# Altium PCB PCB1.PcbDoc (part 5 of 5)
Units mm, origin at the board's own origin, x right, y up, seen from the top; angles counter-clockwise.
Board outline 200 x 110 mm, 4 copper layers (Top Layer, Power Layer, GND Layer, Bottom Layer), stack 1.714 mm thick; 627 components, 400 nets, 2020 pads, 570 vias.
Unrouted connection lines stored in the file: 110.
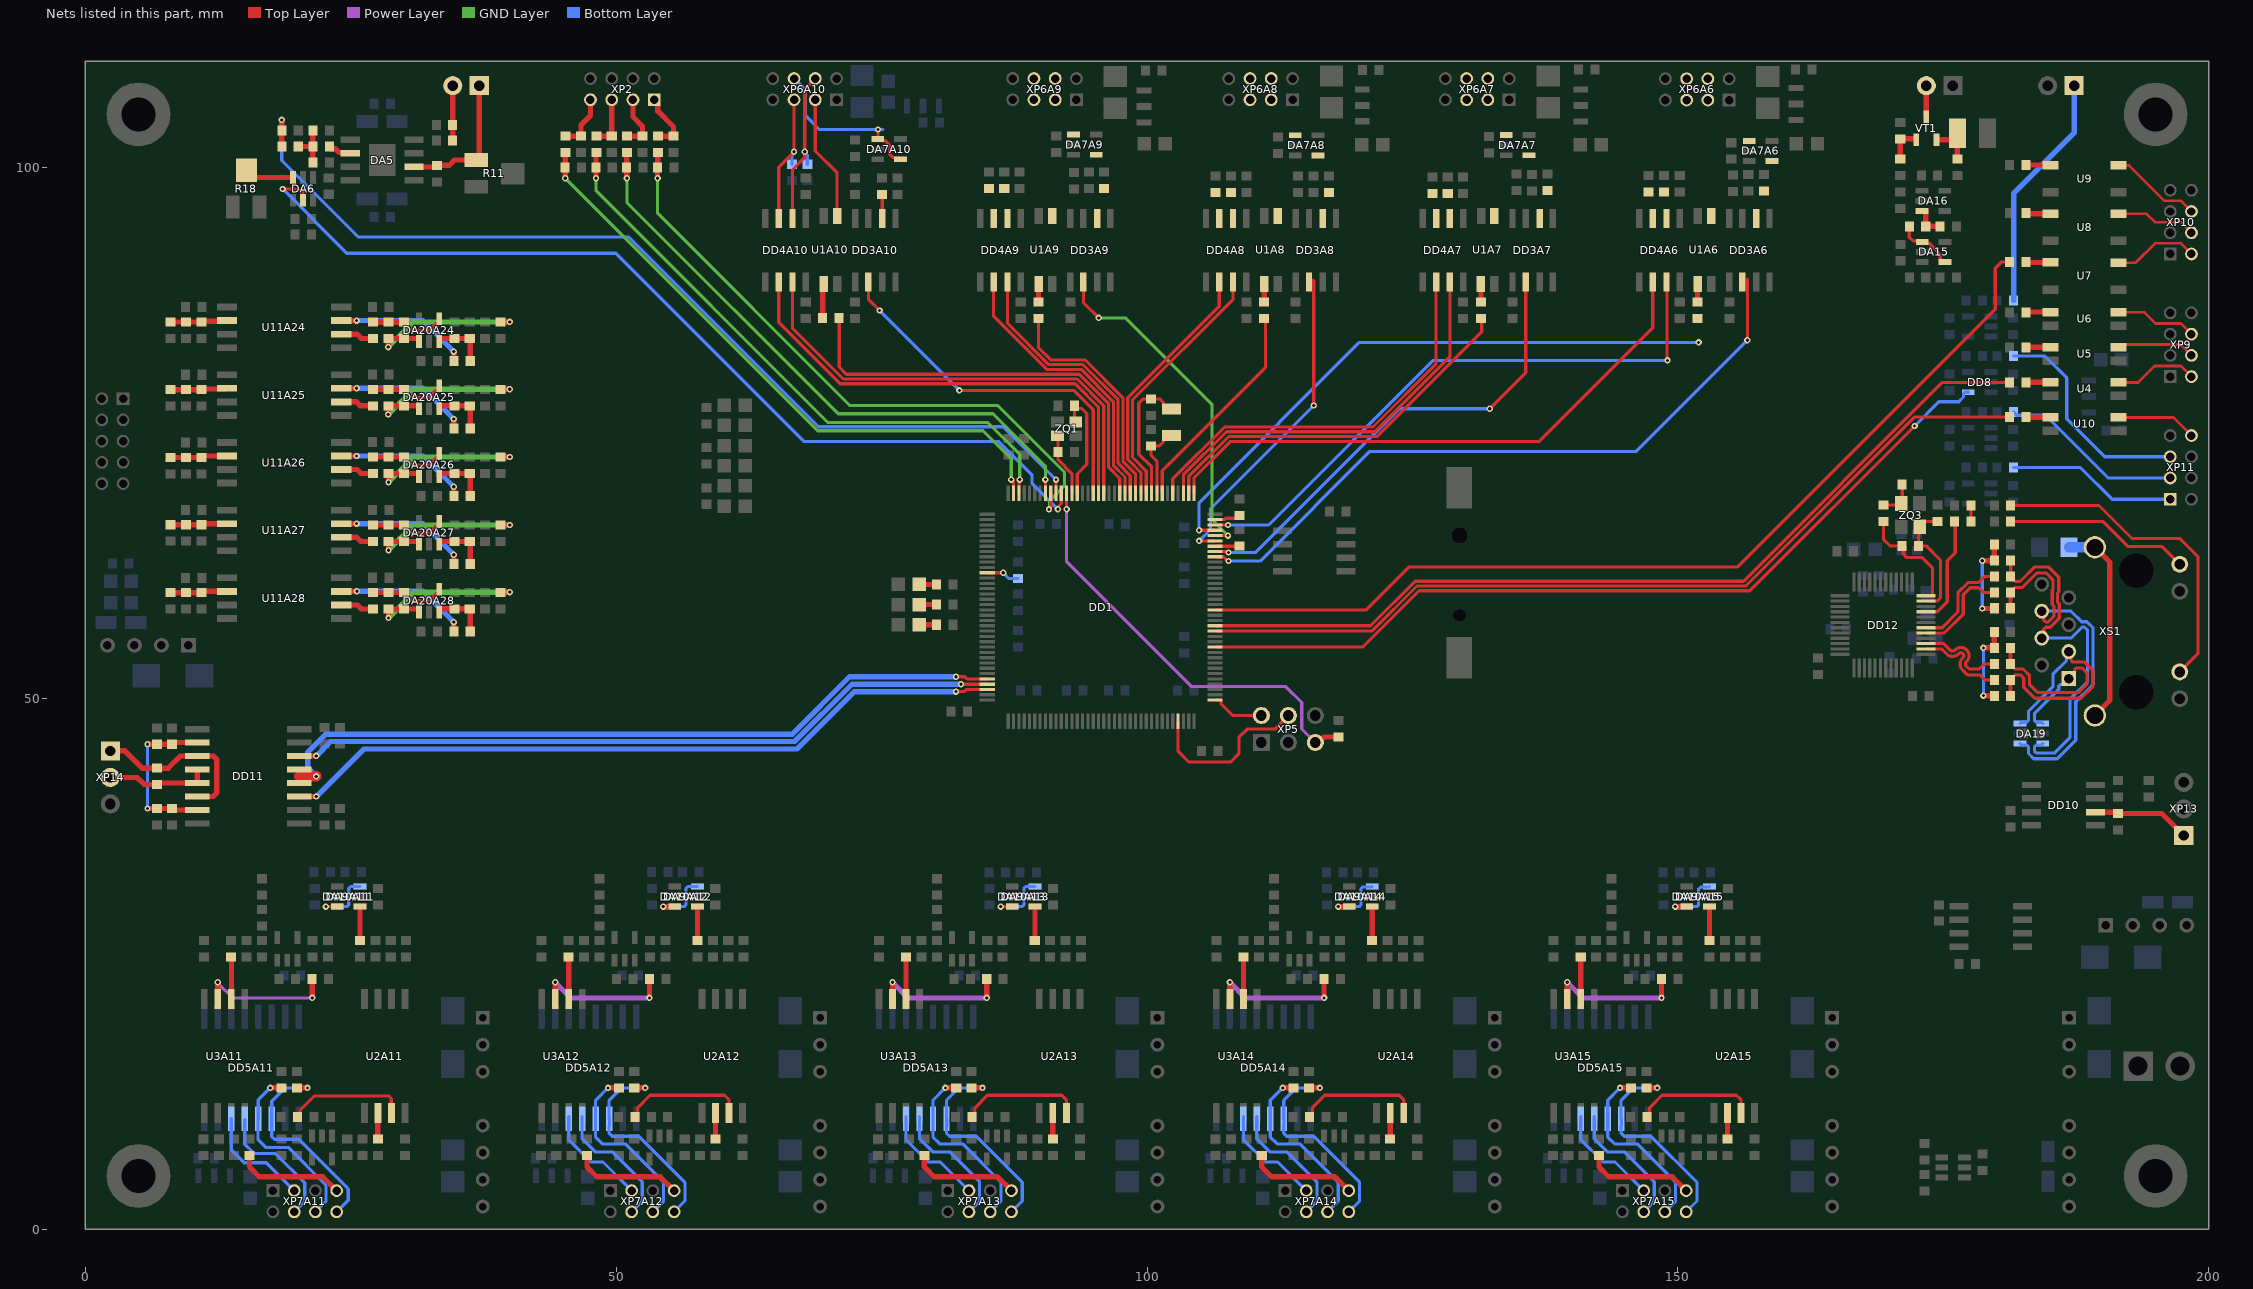
[diagram p6: the nets of this part, all layers, seen from the top]

## Via types
v1: diameter 0.6, hole 0.3, Top Layer to Bottom Layer, tented both sides, 557 vias
v2: diameter 0.6, hole 0.3, Top Layer to Bottom Layer, 12 vias
v3: diameter 0.5, hole 0.2, Top Layer to Bottom Layer, tented both sides, 1 vias

## Nets (pads, with @x,y where several pads share a name; then routed paths per layer and width w, separated by ;. In a path a pad name is that pad's centre, name@x,y a point inside that pad or via, vN(x,y) a via of type N, cw(c..) or ccw(c..) an arc to the next point about the centre after c; other vN are vias at no path point) (continued)
NetC100_2: C100.2 C101.1 C102.1 C103.1 DD11.10 DD11.15 | length 15.6
  Top Layer w0.5: v1(5.85,39.619) C102.1@6.725,39.619 C100.2@8.175,39.619 8.315,39.479 DD11.15@10.55,39.479 ; v1(5.85,45.669) C103.1@6.725,45.669 C101.1@8.175,45.669 8.335,45.829 DD11.10@10.55,45.829
  Bottom Layer w0.3: v1(5.85,39.619) v1(5.85,45.669)
NetC105_1: C105.1 XS1.13 XS1.14 | length 19.4
  Top Layer w0.5: XS1.13@189.275,48.382 190.675,49.782 190.675,62.822 XS1.14@189.275,64.222
  Bottom Layer w0.3: C105.1@186.85,64.225 C105.1@186.852,64.222
  Bottom Layer w1: C105.1@186.852,64.222 XS1.14@189.275,64.222
NetC107_1: C107.1 R65.2 R66.2 | length 8.1
  Top Layer w0.5: v1(178.775,50.25) 179.778,50.25 R65.2@179.8,50.229 ; v1(178.775,54.75) 179.778,54.75 179.8,54.728 C107.1@179.8,56.229
  Bottom Layer w0.3: v1(178.775,50.25) v1(178.775,54.75)
NetC108_1: C108.1 R67.2 R68.2 | length 8.3
  Top Layer w0.5: v1(178.675,58.45) 179.775,58.45 R67.2@179.8,58.475 ; v1(178.675,62.95) 179.775,62.95 179.8,62.975 C108.1@179.8,64.475
  Bottom Layer w0.3: v1(178.675,58.45) v1(178.675,62.95)
NetC112_1: C112.1 R78.2 ZQ3.3 | length 3.6
  Top Layer w0.3: R78.2@169.375,68.2 170.9,68.2 171.05,68.35 171.125,68.425 C112.1@171.125,70.15
NetC122A24_2: C122A24.2 R80A24.1 R81A24.1 U11A24.2 | length 5.4
  Top Layer w0.5: R80A24.1@8.025,85.444 R81A24.1@9.475,85.444 C122A24.2@10.925,85.444 ; C122A24.2@10.925,85.507 13.287,85.507 U11A24.2@13.35,85.569
NetC122A25_2: C122A25.2 R80A25.1 R81A25.1 U11A25.2 | length 5.4
  Top Layer w0.5: R80A25.1@8.025,79.069 C122A25.2@10.925,79.069 ; C122A25.2@10.925,79.132 13.288,79.132 U11A25.2@13.35,79.194
NetC122A26_2: C122A26.2 R80A26.1 R81A26.1 U11A26.2 | length 5.4
  Top Layer w0.5: R80A26.1@8.042,72.687 9.492,72.687 10.942,72.687 11.074,72.819 U11A26.2@13.35,72.819
NetC122A27_2: C122A27.2 R80A27.1 R81A27.1 U11A27.2 | length 5.4
  Top Layer w0.5: R80A27.1@8.025,66.344 R81A27.1@9.475,66.344 C122A27.2@10.925,66.344 11.025,66.444 U11A27.2@13.35,66.444
NetC122A28_2: C122A28.2 R80A28.1 R81A28.1 U11A28.2 | length 5.4
  Top Layer w0.5: R80A28.1@8.025,59.944 C122A28.2@10.925,59.944 11.05,60.069 U11A28.2@13.35,60.069
NetC124A24_1: C124A24.1 DA20A24.3 R82A24.2 R84A24.1 | length 5.2
  Top Layer w0.5: DA20A24.3@33.325,83.594 33.325,83.769 33.45,83.894 34.75,83.894 36.2,83.894 36.25,83.844 R82A24.2@36.25,81.775
NetC124A25_1: C124A25.1 DA20A25.3 R82A25.2 R84A25.1 | length 5
  Top Layer w0.5: DA20A25.3@33.325,77.275 33.325,77.425 33.45,77.55 R84A25.1@34.75,77.55 C124A25.1@36.2,77.55 36.25,77.5 R82A25.2@36.25,75.65
NetC124A26_1: C124A26.1 DA20A26.3 R82A26.2 R84A26.1 | length 5.3
  Top Layer w0.5: DA20A26.3@33.325,70.9 33.325,71.15 33.35,71.175 R84A26.1@34.75,71.175 36.25,71.175 R82A26.2@36.25,69.05
NetC124A27_1: C124A27.1 DA20A27.3 R82A27.2 R84A27.1 | length 5.2
  Top Layer w0.5: DA20A27.3@33.325,64.494 33.325,64.644 33.45,64.769 36.2,64.769 36.25,64.719 R82A27.2@36.25,62.644
NetC124A28_1: C124A28.1 DA20A28.3 R82A28.2 R84A28.1 | length 5.3
  Top Layer w0.5: DA20A28.3@33.325,58.125 33.325,58.4 33.35,58.425 R84A28.1@34.75,58.425 C124A28.1@36.2,58.425 36.25,58.375 R82A28.2@36.25,56.294
NetC126A24_1: C126A24.1 DA20A24.4 R83A24.2 R85A24.2 | length 7.2
  Top Layer w0.3: R85A24.2@30,85.444 30.05,85.444 30.825,84.669 32.355,84.669 32.98,85.294 33.2,85.294 33.325,85.419 DA20A24.4@33.325,85.744
  Top Layer w0.58: R83A24.2@27.1,85.444 28.55,85.444 R85A24.2@30,85.444
NetC126A24_2: C126A24.2 DA20A24.1 R85A24.1 R86A24.1 | length 17.2
  Top Layer w0.5: v1(28.525,83.075) 28.537,83.087 28.537,83.888 C126A24.2@28.55,83.9 ; C126A24.2@28.55,83.894 31.3,83.894 31.425,83.769 DA20A24.1@31.425,83.594 ; R86A24.1@39.1,85.45 v1(39.975,85.45)
  GND Layer w0.5: v1(28.525,83.075) 30.9,85.45 v1(39.975,85.45)
NetC126A25_1: C126A25.1 DA20A25.4 R83A25.2 R85A25.2 | length 7.2
  Top Layer w0.3: R85A25.2@30,79.1 30.05,79.1 30.8,78.35 32.339,78.35 32.964,78.975 33.2,78.975 33.325,79.1 DA20A25.4@33.325,79.425
  Top Layer w0.5: R83A25.2@27.1,79.1 C126A25.1@28.55,79.1 R85A25.2@30,79.1
NetC126A25_2: C126A25.2 DA20A25.1 R85A25.1 R86A25.1 | length 17.2
  Top Layer w0.5: v1(28.525,76.725) 28.537,76.737 28.537,77.538 C126A25.2@28.55,77.55 31.3,77.55 31.425,77.425 DA20A25.1@31.425,77.275 ; R86A25.1@39.1,79.1 v1(39.975,79.1)
  GND Layer w0.5: v1(28.525,76.725) 30.9,79.1 v1(39.975,79.1)
NetC126A26_1: C126A26.1 DA20A26.4 R83A26.2 R85A26.2 | length 7.2
  Top Layer w0.3: R85A26.2@30,72.725 30.05,72.725 30.8,71.975 32.35,71.975 32.975,72.6 33.2,72.6 33.325,72.725 DA20A26.4@33.325,73.05
  Top Layer w0.5: R83A26.2@27.1,72.725 C126A26.1@28.55,72.725 R85A26.2@30,72.725
NetC126A26_2: C126A26.2 DA20A26.1 R85A26.1 R86A26.1 | length 17.2
  Top Layer w0.5: v1(28.55,70.35) C126A26.2@28.55,71.175 R85A26.1@30,71.175 31.3,71.175 31.425,71.05 DA20A26.1@31.425,70.9 ; R86A26.1@39.1,72.725 v1(39.975,72.725)
  GND Layer w0.5: v1(28.55,70.35) 30.925,72.725 v1(39.975,72.725)
NetC126A27_1: C126A27.1 DA20A27.4 R83A27.2 R85A27.2 | length 7.1
  Top Layer w0.3: R85A27.2@30.05,66.319 30.775,65.594 32.399,65.594 32.999,66.194 33.2,66.194 33.325,66.319 DA20A27.4@33.325,66.644
  Top Layer w0.5: R83A27.2@27.1,66.325 R85A27.2@30,66.325
NetC126A27_2: C126A27.2 DA20A27.1 R85A27.1 R86A27.1 | length 17.1
  Top Layer w0.5: v1(28.55,63.95) C126A27.2@28.55,64.775 R85A27.1@30,64.775 ; R85A27.1@30,64.769 31.3,64.769 31.425,64.644 DA20A27.1@31.425,64.494 ; R86A27.1@39.15,66.325 v1(39.975,66.325)
  GND Layer w0.5: v1(28.55,63.95) 30.925,66.325 v1(39.975,66.325)
NetC126A28_1: C126A28.1 DA20A28.4 R83A28.2 R85A28.2 | length 7.2
  Top Layer w0.3: R83A28.2@27.1,59.944 R83A28.2@27.112,59.957 ; R85A28.2@29.987,59.957 30,59.969 30.05,59.969 30.825,59.194 32.35,59.194 32.975,59.819 33.2,59.819 33.325,59.944 DA20A28.4@33.325,60.269
  Top Layer w0.5: R83A28.2@27.112,59.957 28.55,59.957 R85A28.2@29.987,59.957
NetC126A28_2: C126A28.2 DA20A28.1 R85A28.1 R86A28.1 | length 17.2
  Top Layer w0.5: v1(28.55,57.575) C126A28.2@28.55,58.4 R85A28.1@30,58.4 31.3,58.4 31.425,58.275 DA20A28.1@31.425,58.119 ; R86A28.1@39.1,59.975 v1@39.95,59.975
  GND Layer w0.5: v1(28.55,57.575) 30.975,60 v1(39.975,60)
NetDA5_6: DA5.6 R14.1 | length 2.3
  Top Layer w0.5: R14.1@22.975,101.975 22.975,101.925 23.15,101.75 23.55,101.75 23.9,101.4 24.9,101.4 DA5.6@24.95,101.35
NetDA6_3: DA6.3 R18.2 | length 4.7
  Top Layer w0.5: R18.2@15.175,99.725 15.85,99.05 DA6.3@19.55,99.05
NetDA7A6_1: DA7A6.1 DA7A6.4 XP6A6.6
NetDA7A7_1: DA7A7.1 DA7A7.4 XP6A7.6
NetDA7A8_1: DA7A8.1 DA7A8.4 XP6A8.6
NetDA7A9_1: DA7A9.1 DA7A9.4 XP6A9.6
NetDA7A10_1: DA7A10.1 DA7A10.4 XP6A10.6 | length 16.1
  Top Layer w0.3: DA7A10.1@74.63,102.67 DA7A10.1@74.655,102.645 ; v1(74.655,103.57) DA7A10.1@74.655,102.645 ; DA7A10.4@76.78,100.77 76.655,100.895 76.105,100.895 75.75,101.25 75.75,102.1 75.305,102.545 74.755,102.545 DA7A10.1@74.655,102.645
  Bottom Layer w0.3: XP6A10.6@66.75,108.375 67.75,107.375 67.75,104.963 69.138,103.575 75.1,103.575
NetDA9A11_3: DA9A11.3 DA10A11.1 DA10A11.4 | length 6
  Top Layer w0.3: v1(22.65,30.375) DA9A11.3@23.725,30.375
  Bottom Layer w0.3: v1(22.65,30.375) DA10A11.1@23.725,30.375 24.624,30.375 24.8,30.551 24.8,32.099 24.976,32.275 DA10A11.4@25.875,32.275
NetDA9A11_4: DA9A11.4 R26A11.2 | length 3.2
  Top Layer w0.5: R26A11.2@25.865,27.2 DA9A11.4@25.865,30.365
NetDA9A12_3: DA9A12.3 DA10A12.1 DA10A12.4 | length 6
  Top Layer w0.5: v1(54.425,30.375) DA9A12.3@55.5,30.375
  Bottom Layer w0.3: DA10A12.1@55.5,30.375 56.399,30.375 56.575,30.551 56.575,32.099 56.751,32.275 DA10A12.4@57.65,32.275
  Bottom Layer w0.5: v1(54.425,30.375) DA10A12.1@55.5,30.375
NetDA9A12_4: DA9A12.4 R26A12.2 | length 3.2
  Top Layer w0.5: R26A12.2@57.65,27.2 DA9A12.4@57.65,30.375
NetDA9A13_3: DA9A13.3 DA10A13.1 DA10A13.4 | length 6
  Top Layer w0.3: v1(86.225,30.375) DA9A13.3@87.3,30.375
  Bottom Layer w0.3: v1(86.225,30.375) DA10A13.1@87.3,30.375 88.224,30.375 88.4,30.551 88.4,32.099 88.576,32.275 DA10A13.4@89.45,32.275
NetDA9A13_4: DA9A13.4 R26A13.2 | length 3.2
  Top Layer w0.5: R26A13.2@89.425,27.2 89.437,27.213 89.437,30.363 DA9A13.4@89.45,30.375
NetDA9A14_3: DA9A14.3 DA10A14.1 DA10A14.4 | length 5.9
  Top Layer w0.5: v1(118,30.375) DA9A14.3@119.05,30.375
  Bottom Layer w0.3: DA10A14.1@119.05,30.375 119.979,30.375 120.154,30.551 120.154,32.058 120.33,32.233 121.158,32.233 DA10A14.4@121.2,32.275
  Bottom Layer w0.5: v1(118,30.375) DA10A14.1@119.05,30.375
NetDA9A14_4: DA9A14.4 R26A14.2 | length 3.2
  Top Layer w0.5: R26A14.2@121.2,27.2 DA9A14.4@121.2,30.375
NetDA9A15_3: DA9A15.3 DA10A15.1 DA10A15.4 | length 6
  Top Layer w0.5: v1(149.75,30.375) DA9A15.3@150.825,30.375
  Bottom Layer w0.3: DA10A15.1@150.825,30.375 151.774,30.375 151.95,30.551 151.95,32.037 152.126,32.213 152.913,32.213 DA10A15.4@152.975,32.275
  Bottom Layer w0.5: v1(149.75,30.375) DA10A15.1@150.825,30.375
NetDA9A15_4: DA9A15.4 R26A15.2 | length 3.2
  Top Layer w0.5: R26A15.2@152.975,27.2 DA9A15.4@152.975,30.375
NetDA15_1: DA15.1 DA15.4 R42.1 | length 5.7
  Top Layer w0.3: 171.796,93.437 R42.1@171.796,94.45 ; 171.809,93.437 172.178,93.067 172.928,93.067 DA15.1@173.009,92.987 173.134,92.862 173.659,92.862 174.717,91.804 174.717,91.212 174.842,91.087 DA15.4@175.159,91.087
NetDA16_3: DA16.3 R42.2 R43.1 | length 3.1
  Top Layer w0.5: DA16.3@172.996,95.9 173.321,95.9 173.346,95.875 R42.2@173.346,94.45 R43.1@174.696,94.45
NetDD1_48: DD1.48 R5.1 | length 3.1
  Top Layer w0.3: DD1.48@84.95,61.825 v1(86.45,61.825)
  Bottom Layer w0.3: v1(86.45,61.825) 87,61.275 R5.1@87.85,61.275
NetDD1_138: DD1.138 R9.1 | length 2.5
  Top Layer w0.3: DD1.138@106.4,64.325 107.7,64.325 R9.1@108.85,64.325
NetDD1_143: DD1.143 R10.1 | length 2.5
  Top Layer w0.3: DD1.143@106.4,66.825 107.276,66.825 107.402,66.951 108.426,66.951 R10.1@108.7,67.225
NetDD3A6_6: DD3A6.6 R22A6.1
NetDD3A7_6: DD3A7.6 R22A7.1
NetDD3A8_6: DD3A8.6 R22A8.1
NetDD3A9_6: DD3A9.6 R22A9.1
NetDD3A10_6: DD3A10.6 R22A10.1 | length 2.3
  Top Layer w0.3: DD3A10.6@75.05,95.2 R22A10.1@75.05,97.45
NetDD4A6_2: DD4A6.2 R23A6.2 XP6A6.4
NetDD4A6_3: DD4A6.3 R24A6.2 XP6A6.5
NetDD4A7_2: DD4A7.2 R23A7.2 XP6A7.4
NetDD4A7_3: DD4A7.3 R24A7.2 XP6A7.5
NetDD4A8_2: DD4A8.2 R23A8.2 XP6A8.4
NetDD4A8_3: DD4A8.3 R24A8.2 XP6A8.5
NetDD4A9_2: DD4A9.2 R23A9.2 XP6A9.4
NetDD4A9_3: DD4A9.3 R24A9.2 XP6A9.5
NetDD4A10_2: DD4A10.2 R23A10.2 XP6A10.4 | length 15.3
  Top Layer w0.3: DD4A10.2@66.6,95.2 66.6,99.8 67.75,100.95 v1(67.75,101.475) 67.75,107.375 XP6A10.4@68.75,108.375
  Bottom Layer w0.3: v1(67.75,101.475) 67.75,101.411 68,101.161 R23A10.2@68,100.3
NetDD4A10_3: DD4A10.3 R24A10.2 XP6A10.5 | length 13
  Top Layer w0.3: DD4A10.3@65.3,95.2 65.3,100.025 v1(66.75,101.475) XP6A10.5@66.75,106.375
  Bottom Layer w0.3: R24A10.2@66.55,100.3 66.55,101.194 66.75,101.394 v1(66.75,101.475)
NetDD5A11_11: DD5A11.11 R36A11.1 XP7A11.8 | length 20.1
  Top Layer w0.5: R36A11.1@19.89,13.3 v1(20.915,13.3)
  Bottom Layer w0.3: v1(20.915,13.3) 18.814,13.3 17.555,12.041 17.555,8.71 17.809,8.456 20.107,8.456 24.565,3.998 24.565,3.981 24.765,3.781 24.765,2.725 XP7A11.8@23.665,1.625
NetDD5A11_12: DD5A11.12 R37A11.1 XP7A11.6 | length 17.5
  Top Layer w0.5: v1(17.415,13.3) R37A11.1@18.44,13.3
  Bottom Layer w0.3: v1(17.415,13.3) 16.285,12.17 16.285,10.42 16.265,10.4 16.265,8.425 16.99,7.7 19.098,7.7 22.665,4.133 22.665,2.625 XP7A11.6@21.665,1.625
NetDD5A11_13: DD5A11.13 XP7A11.4 | length 12.6
  Bottom Layer w0.3: DD5A11.13@15.016,10.299 15.016,7.999 15.89,7.125 17.89,7.125 20.665,4.35 20.665,2.625 XP7A11.4@19.665,1.625
NetDD5A11_14: DD5A11.14 XP7A11.3 | length 10.4
  Bottom Layer w0.3: DD5A11.14@13.745,10.4 13.745,7.47 14.965,6.25 17.04,6.25 XP7A11.3@19.665,3.625
NetDD5A12_11: DD5A12.11 R36A12.1 XP7A12.8 | length 20.3
  Top Layer w0.5: R36A12.1@51.7,13.3 v1(52.725,13.3)
  Bottom Layer w0.3: DD5A12.11@49.33,9.727 49.33,9.025 49.616,8.74 52.135,8.74 56.472,4.403 56.472,2.647 XP7A12.8@55.45,1.625 ; DD5A12.11@49.33,10.4 49.33,12.122 50.508,13.3 v1(52.725,13.3) ; DD5A12.11@49.36,9.727 DD5A12.11@49.36,10.4
NetDD5A12_12: DD5A12.12 R37A12.1 XP7A12.6 | length 17.5
  Top Layer w0.5: v1(49.225,13.3) R37A12.1@50.25,13.3
  Bottom Layer w0.3: v1(49.225,13.3) 48.06,12.135 DD5A12.12@48.06,10.4 48.06,8.665 48.7,8.025 50.85,8.025 54.463,4.412 54.463,2.638 XP7A12.6@53.45,1.625
NetDD5A12_13: DD5A12.13 XP7A12.4 | length 12.7
  Bottom Layer w0.3: DD5A12.13@46.79,10.6 46.79,8.51 48.025,7.275 49.625,7.275 52.45,4.45 52.45,2.625 XP7A12.4@51.45,1.625
NetDD5A12_14: DD5A12.14 XP7A12.3 | length 10.1
  Bottom Layer w0.3: DD5A12.14@45.52,10.6 45.52,8.422 47.617,6.325 48.75,6.325 XP7A12.3@51.45,3.625
NetDD5A13_11: DD5A13.11 R36A13.1 XP7A13.8 | length 20.3
  Top Layer w0.5: R36A13.1@83.475,13.3 v1(84.5,13.3)
  Bottom Layer w0.3: DD5A13.11@81.105,9.727 81.105,9.025 81.391,8.74 83.91,8.74 88.247,4.403 88.247,2.647 XP7A13.8@87.225,1.625 ; DD5A13.11@81.105,10.4 81.105,12.122 82.283,13.3 v1(84.5,13.3) ; DD5A13.11@81.135,9.727 DD5A13.11@81.135,10.4
NetDD5A13_12: DD5A13.12 R37A13.1 XP7A13.6 | length 17.5
  Top Layer w0.5: v1(81,13.3) R37A13.1@82.025,13.3
  Bottom Layer w0.3: v1(81,13.3) 79.835,12.135 DD5A13.12@79.835,10.4 79.835,8.665 80.475,8.025 82.625,8.025 86.238,4.412 86.238,2.638 XP7A13.6@85.225,1.625
NetDD5A13_13: DD5A13.13 XP7A13.4 | length 12.7
  Bottom Layer w0.3: DD5A13.13@78.565,10.6 78.565,8.51 79.8,7.275 81.4,7.275 84.225,4.45 84.225,2.625 XP7A13.4@83.225,1.625
NetDD5A13_14: DD5A13.14 XP7A13.3 | length 10.1
  Bottom Layer w0.3: DD5A13.14@77.295,10.6 77.295,8.422 79.392,6.325 80.525,6.325 XP7A13.3@83.225,3.625
NetDD5A14_11: DD5A14.11 R36A14.1 XP7A14.8 | length 20.3
  Top Layer w0.5: R36A14.1@115.25,13.3 v1(116.275,13.3)
  Bottom Layer w0.3: DD5A14.11@112.88,9.727 112.88,9.025 113.166,8.74 115.685,8.74 120.022,4.403 120.022,2.647 XP7A14.8@119,1.625 ; DD5A14.11@112.88,10.4 112.88,12.122 114.058,13.3 v1(116.275,13.3) ; DD5A14.11@112.91,9.727 DD5A14.11@112.91,10.4
NetDD5A14_12: DD5A14.12 R37A14.1 XP7A14.6 | length 17.5
  Top Layer w0.5: v1(112.775,13.3) R37A14.1@113.8,13.3
  Bottom Layer w0.3: v1(112.775,13.3) 111.61,12.135 DD5A14.12@111.61,10.4 111.61,8.665 112.25,8.025 114.4,8.025 118.013,4.412 118.013,2.638 XP7A14.6@117,1.625
NetDD5A14_13: DD5A14.13 XP7A14.4 | length 12.7
  Bottom Layer w0.3: DD5A14.13@110.34,10.6 110.34,8.51 111.575,7.275 113.175,7.275 116,4.45 116,2.625 XP7A14.4@115,1.625
NetDD5A14_14: DD5A14.14 XP7A14.3 | length 10.1
  Bottom Layer w0.3: DD5A14.14@109.07,10.6 109.07,8.422 111.167,6.325 112.3,6.325 XP7A14.3@115,3.625
NetDD5A15_11: DD5A15.11 R36A15.1 XP7A15.8 | length 20.3
  Top Layer w0.5: R36A15.1@147.025,13.3 v1(148.05,13.3)
  Bottom Layer w0.3: DD5A15.11@144.655,9.727 144.655,9.025 144.941,8.74 147.46,8.74 151.797,4.403 151.797,2.647 XP7A15.8@150.775,1.625 ; DD5A15.11@144.655,10.4 144.655,12.122 145.833,13.3 v1(148.05,13.3) ; DD5A15.11@144.685,9.727 DD5A15.11@144.685,10.4
NetDD5A15_12: DD5A15.12 R37A15.1 XP7A15.6 | length 17.5
  Top Layer w0.5: v1(144.55,13.3) R37A15.1@145.575,13.3
  Bottom Layer w0.3: v1(144.55,13.3) 143.385,12.135 DD5A15.12@143.385,10.4 143.385,8.665 144.025,8.025 146.175,8.025 149.788,4.412 149.788,2.638 XP7A15.6@148.775,1.625
NetDD5A15_13: DD5A15.13 XP7A15.4 | length 12.7
  Bottom Layer w0.3: DD5A15.13@142.115,10.6 142.115,8.51 143.35,7.275 144.95,7.275 147.775,4.45 147.775,2.625 XP7A15.4@146.775,1.625
NetDD5A15_14: DD5A15.14 XP7A15.3 | length 10.1
  Bottom Layer w0.3: DD5A15.14@140.845,10.6 140.845,8.422 142.942,6.325 144.075,6.325 XP7A15.3@146.775,3.625
NetDD10_2: DD10.2 R63.1 XP13.1 | length 9.2
  Top Layer w0.5: DD10.2@189.325,39.275 191.325,39.275 R63.1@191.45,39.15 195.575,39.15 XP13.1@197.65,37.075
NetDD11_11: DD11.11 DD11.14 R64.1 XP14.1 | length 16.4
  Top Layer w0.5: XP14.1@2.35,45.044 3.725,45.044 5.35,43.419 R64.1@6.725,43.419 7.8,43.419 8.94,44.559 DD11.11@10.55,44.559 12.06,44.559 12.375,44.244 12.375,41.094 12.03,40.749 DD11.14@10.55,40.749
NetDD11_12: DD11.12 DD11.13 R64.2 XP14.2 | length 9.8
  Top Layer w0.5: XP14.2@2.35,42.544 4.875,42.544 5.55,41.869 R64.2@6.725,41.869 6.875,42.019 DD11.13@10.55,42.019 DD11.12@10.55,43.289
NetDD12_9: DD12.9 R77.2 | length 10.2
  Top Layer w0.3: DD12.9@173.375,58.15 174.125,58.15 174.42,58.15 175.375,59.105 175.375,62.95 176.126,63.701 R77.2@176.126,66.576
NetR6_2: R6.2 VD1.1 | length 1.6
  Top Layer w0.5: VD1.1@78.55,60.725 R6.2@80.175,60.725
NetR7_2: R7.2 VD2.1 | length 1.6
  Top Layer w0.5: VD2.1@78.55,58.825 R7.2@80.175,58.825
NetR8_2: R8.2 VD3.1 | length 1.6
  Top Layer w0.5: VD3.1@78.55,56.925 R8.2@80.175,56.925
NetR14_2: R14.2 R15.1 R16.1 R17.1 | length 4.4
  Top Layer w0.5: R16.1@20.05,101.975 R14.2@21.425,101.975 ; R17.1@21.425,100.475 R14.2@21.425,101.975 ; R15.1@21.425,103.475 R14.2@21.425,101.975
NetR21A6_2: R21A6.2 U1A6.1 | length 1.7
  Top Layer w0.5: R21A6.2@151.85,87.325 U1A6.1@151.85,89.025
NetR21A7_2: R21A7.2 U1A7.1 | length 1.7
  Top Layer w0.5: R21A7.2@131.45,87.325 U1A7.1@131.45,89.025
NetR21A8_2: R21A8.2 U1A8.1 | length 1.7
  Top Layer w0.5: R21A8.2@111.025,87.325 U1A8.1@111.025,89.025
NetR21A9_2: R21A9.2 U1A9.1 | length 1.7
  Top Layer w0.5: R21A9.2@89.775,87.325 U1A9.1@89.775,89.025
NetR21A10_2: R21A10.2 U1A10.1 | length 3.2
  Top Layer w0.5: R21A10.2@69.45,85.825 69.45,88.95 U1A10.1@69.525,89.025
NetR27A11_2: R27A11.2 XP7A11.7 | length 10.2
  Top Layer w0.5: R27A11.2@15.465,6.925 15.465,5.85 16.38,4.935 22.355,4.935 XP7A11.7@23.665,3.625
NetR27A12_2: R27A12.2 XP7A12.7 | length 10.2
  Top Layer w0.5: R27A12.2@47.25,6.925 47.25,5.85 48.165,4.935 54.14,4.935 XP7A12.7@55.45,3.625
NetR27A13_2: R27A13.2 XP7A13.7 | length 10.2
  Top Layer w0.5: R27A13.2@79.025,6.925 79.025,5.85 79.94,4.935 85.915,4.935 XP7A13.7@87.225,3.625
NetR27A14_2: R27A14.2 XP7A14.7 | length 10.2
  Top Layer w0.5: R27A14.2@110.8,6.925 110.8,5.85 111.715,4.935 117.69,4.935 XP7A14.7@119,3.625
NetR27A15_2: R27A15.2 XP7A15.7 | length 10.2
  Top Layer w0.5: R27A15.2@142.575,6.925 142.575,5.85 143.49,4.935 149.465,4.935 XP7A15.7@150.775,3.625
NetR30A11_1: R30A11.1 U2A11.7 | length 11.4
  Top Layer w0.3: R30A11.1@19.94,10.575 20.215,10.85 20.215,11.179 21.572,12.536 28.585,12.536 28.815,12.306 U2A11.7@28.815,10.925
NetR30A12_1: R30A12.1 U2A12.7 | length 11.3
  Top Layer w0.3: R30A12.1@51.75,10.575 52.025,10.85 52.025,11.445 53.18,12.6 60.2,12.6 60.625,12.175 U2A12.7@60.625,11.1
NetR30A13_1: R30A13.1 U2A13.7 | length 11.3
  Top Layer w0.3: R30A13.1@83.525,10.575 83.8,10.85 83.8,11.445 84.955,12.6 91.975,12.6 92.4,12.175 U2A13.7@92.4,11.1
NetR30A14_1: R30A14.1 U2A14.7 | length 11.3
  Top Layer w0.3: R30A14.1@115.3,10.575 115.575,10.85 115.575,11.445 116.73,12.6 123.75,12.6 124.175,12.175 U2A14.7@124.175,11.1
NetR30A15_1: R30A15.1 U2A15.7 | length 11.3
  Top Layer w0.3: R30A15.1@147.075,10.575 147.35,10.85 147.35,11.445 148.505,12.6 155.525,12.6 155.95,12.175 U2A15.7@155.95,11.1
NetR31A11_1: R31A11.1 U3A11.7 | length 12.9
  Top Layer w0.3: v1@12.47,23.245 v1(12.475,23.25)
  Top Layer w0.5: U3A11.7@12.47,21.695 v1@12.47,23.245 ; v1@21.365,21.795 R31A11.1@21.365,23.55
  Power Layer w0.3: v1(12.475,23.25) 12.475,23.175 13.875,21.775 v1(21.365,21.775)
NetR31A12_1: R31A12.1 U3A12.7 | length 12.8
  Top Layer w0.5: U3A12.7@44.25,21.675 v1(44.25,23.25) ; v1(53.125,21.775) R31A12.1@53.125,23.55
  Power Layer w0.5: v1(44.25,23.25) 45.725,21.775 v1(53.125,21.775)
NetR31A13_1: R31A13.1 U3A13.7 | length 12.8
  Top Layer w0.5: U3A13.7@76.025,21.675 v1(76.025,23.25) ; v1(84.9,21.775) R31A13.1@84.9,23.55
  Power Layer w0.5: v1(76.025,23.25) 77.5,21.775 v1(84.9,21.775)
NetR31A14_1: R31A14.1 U3A14.7 | length 12.8
  Top Layer w0.5: U3A14.7@107.8,21.675 v1(107.8,23.25) ; v1(116.675,21.775) R31A14.1@116.675,23.55
  Power Layer w0.5: v1(107.8,23.25) 109.275,21.775 v1(116.675,21.775)
NetR31A15_1: R31A15.1 U3A15.7 | length 12.8
  Top Layer w0.5: U3A15.7@139.575,21.675 v1(139.575,23.25) ; v1(148.45,21.775) R31A15.1@148.45,23.55
  Power Layer w0.5: v1(139.575,23.25) 141.05,21.775 v1(148.45,21.775)
NetR32A11_1: R32A11.1 U2A11.6 | length 2.4
  Top Layer w0.5: R32A11.1@27.54,8.5 U2A11.6@27.54,10.925
NetR32A12_1: R32A12.1 U2A12.6 | length 2.6
  Top Layer w0.5: R32A12.1@59.35,8.475 U2A12.6@59.35,11.1
NetR32A13_1: R32A13.1 U2A13.6 | length 2.6
  Top Layer w0.5: R32A13.1@91.125,8.475 U2A13.6@91.125,11.1
NetR32A14_1: R32A14.1 U2A14.6 | length 2.6
  Top Layer w0.5: R32A14.1@122.9,8.475 U2A14.6@122.9,11.1
NetR32A15_1: R32A15.1 U2A15.6 | length 2.6
  Top Layer w0.5: R32A15.1@154.675,8.475 U2A15.6@154.675,11.1
NetR33A11_1: R33A11.1 U3A11.6 | length 4
  Top Layer w0.5: U3A11.6@13.762,21.675 R33A11.1@13.762,25.637
NetR33A12_1: R33A12.1 U3A12.6 | length 4
  Top Layer w0.5: U3A12.6@45.525,21.675 R33A12.1@45.525,25.65
NetR33A13_1: R33A13.1 U3A13.6 | length 4
  Top Layer w0.5: U3A13.6@77.3,21.675 R33A13.1@77.3,25.65
NetR33A14_1: R33A14.1 U3A14.6 | length 4
  Top Layer w0.5: U3A14.6@109.075,21.675 R33A14.1@109.075,25.65
NetR33A15_1: R33A15.1 U3A15.6 | length 4
  Top Layer w0.5: U3A15.6@140.85,21.675 R33A15.1@140.85,25.65
NetR44_2: R44.2 R46.2 VT1.1 | length 3.5
  Top Layer w0.5: R46.2@170.925,102.693 172.375,102.693 VT1.1@172.45,102.618 ; R44.2@170.946,100.793 R46.2@170.946,102.693
NetR45_2: R45.2 R47.2 VT1.2 | length 4.6
  Top Layer w0.5: VT1.2@174.35,102.618 175.75,102.618 R47.2@176.325,103.193 ; R45.2@176.325,100.793 R47.2@176.325,103.193 ; R47.2@176.35,103.218 R47.2@176.325,103.193
NetR48_1: R48.1 U4.1 | length 2.3
  Top Layer w0.5: R48.1@182.8,79.75 182.825,79.775 U4.1@185.1,79.775
NetR49_1: R49.1 U5.1 | length 2.3
  Top Layer w0.5: R49.1@182.8,83.05 182.825,83.075 U5.1@185.1,83.075
NetR50_1: R50.1 U6.1 | length 2.3
  Top Layer w0.5: R50.1@182.8,86.35 182.825,86.375 U6.1@185.1,86.375
NetR51_1: R51.1 U7.1 | length 2.3
  Top Layer w0.5: R51.1@182.8,91.1 182.85,91.05 U7.1@185.1,91.05
NetR52_1: R52.1 U8.1 | length 2.3
  Top Layer w0.5: R52.1@182.8,95.7 182.85,95.65 U8.1@185.1,95.65
NetR53_1: R53.1 U9.1 | length 2.3
  Top Layer w0.5: R53.1@182.8,100.225 U9.1@185.1,100.225
NetR54_1: R54.1 XP11.1 | length 16
  Bottom Layer w0.3: R54.1@181.625,71.725 187.925,71.725 190.9,68.75 XP11.1@196.375,68.75
NetR55_1: R55.1 XP11.3 | length 17.4
  Bottom Layer w0.3: R55.1@181.625,76.975 181.625,76.925 181.9,76.65 184.625,76.65 190.525,70.75 XP11.3@196.375,70.75
NetR56_1: R56.1 XP11.5 | length 20.9
  Bottom Layer w0.3: R56.1@181.625,82.225 184.575,82.225 186.625,80.175 186.625,76.325 190.2,72.75 XP11.5@196.375,72.75
NetR60_1: R60.1 U10.1 | length 2.3
  Top Layer w0.5: R60.1@182.8,76.5 182.825,76.475 U10.1@185.1,76.475
NetR61_1: R61.1 XP12.1 | length 22.6
  Bottom Layer w0.5: R61.1@181.625,87.475 181.625,97.55 187.325,103.25 XP12.1@187.325,107.7
NetR71_1: R71.1 XS1.10 | length 31.2
  Top Layer w0.3: R71.1@181.35,68.162 189.663,68.162 192.775,65.05 197.275,65.05 198.975,63.35 198.975,54.19 XS1.10@197.275,52.49
NetR74_1: R74.1 XS1.12 | length 17.6
  Top Layer w0.3: R74.1@181.35,66.663 190.022,66.662 192.401,64.282 195.612,64.282 XS1.12@197.275,62.62
NetR75_2: R75.2 R77.1 | length 1.5
  Top Layer w0.3: R77.1@177.6,66.663 R75.2@177.6,68.163
NetR82A24_1: R82A24.1 U11A24.7 | length 12.7
  Top Layer w0.3: U11A24.7@24.1,85.569 U11A24.7@24.103,85.572
  Top Layer w0.5: U11A24.7@24.106,85.575 24.108,85.572 25.547,85.572 v1(25.55,85.575) ; R82A24.1@34.7,81.775 v1(34.7,82.65)
  Bottom Layer w0.5: v1(25.55,85.575) 31.775,85.575 v1(34.7,82.65)
NetR82A25_1: R82A25.1 U11A25.7 | length 12.7
  Top Layer w0.5: U11A25.7@24.1,79.194 24.103,79.197 25.547,79.197 v1(25.55,79.2) ; R82A25.1@34.7,75.425 v1(34.7,76.3)
  Bottom Layer w0.5: v1(25.55,79.2) 31.8,79.2 v1(34.7,76.3)
NetR82A26_1: R82A26.1 U11A26.7 | length 12.7
  Top Layer w0.5: U11A26.7@24.1,72.819 v1@25.544,72.819 ; R82A26.1@34.7,69.05 v1(34.7,69.925)
  Bottom Layer w0.5: v1(25.55,72.825) 31.8,72.825 v1(34.7,69.925)
NetR82A27_1: R82A27.1 U11A27.7 | length 12.7
  Top Layer w0.5: U11A27.7@24.1,66.444 24.103,66.447 25.547,66.447 v1(25.55,66.45) ; R82A27.1@34.7,62.644 v1(34.7,63.525)
  Bottom Layer w0.5: v1(25.55,66.45) 31.775,66.45 v1(34.7,63.525)
NetR82A28_1: R82A28.1 U11A28.7 | length 12.7
  Top Layer w0.5: U11A28.7@24.1,60.069 24.103,60.072 25.572,60.072 v1(25.575,60.075) ; R82A28.1@34.7,56.294 v1(34.7,57.175)
  Bottom Layer w0.5: v1(25.575,60.075) 31.8,60.075 v1(34.7,57.175)
NetR83A24_1: R83A24.1 U11A24.6 | length 3.2
  Top Layer w0.5: U11A24.6@24.1,84.294 25.606,84.294 26.006,83.894 R83A24.1@27.1,83.894
NetR83A25_1: R83A25.1 U11A25.6 | length 3.2
  Top Layer w0.5: U11A25.6@24.1,77.919 25.531,77.919 25.9,77.55 R83A25.1@27.1,77.55
NetR83A26_1: R83A26.1 U11A26.6 | length 3.2
  Top Layer w0.5: U11A26.6@24.1,71.544 25.606,71.544 25.975,71.175 R83A26.1@27.1,71.175
NetR83A27_1: R83A27.1 U11A27.6 | length 3.2
  Top Layer w0.5: U11A27.6@24.1,65.169 25.556,65.169 25.95,64.775 R83A27.1@27.1,64.775
NetR83A28_1: R83A28.1 U11A28.6 | length 3.2
  Top Layer w0.5: U11A28.6@24.1,58.794 25.631,58.794 26.025,58.4 R83A28.1@27.1,58.4
NetU1A6_3: U1A6.3 XP6A6.3
NetU1A7_3: U1A7.3 XP6A7.3
NetU1A8_3: U1A8.3 XP6A8.3
NetU1A9_3: U1A9.3 XP6A9.3
NetU1A10_3: U1A10.3 XP6A10.3 | length 11.8
  Top Layer w0.3: XP6A10.3@68.75,106.375 68.75,101.55 70.8,99.5 U1A10.3@70.8,95.425
NetU4_4: U4.4 XP9.2 | length 7.9
  Top Layer w0.254: U4.4@191.5,79.75 193.35,79.75 194.9,81.3 197.385,81.3 XP9.2@198.385,80.3
NetU5_4: U5.4 XP9.4 | length 7.4
  Top Layer w0.254: U5.4@191.5,83.05 191.773,83.323 192.27,83.323 192.272,83.325 197.36,83.325 XP9.4@198.385,82.3
NetU6_4: U6.4 XP9.6 | length 7.7
  Top Layer w0.254: U6.4@191.5,86.35 193.95,86.35 195,85.3 197.385,85.3 XP9.6@198.385,84.3
NetU7_6: U7.6 XP10.2 | length 8.1
  Top Layer w0.254: U7.6@191.5,91.025 193.1,91.025 194.925,92.85 197.385,92.85 XP10.2@198.385,91.85
NetU8_6: U8.6 XP10.4 | length 7.6
  Top Layer w0.254: U8.6@191.5,95.625 194.15,95.625 194.925,94.85 197.385,94.85 XP10.4@198.385,93.85
NetU9_6: U9.6 XP10.6 | length 8.7
  Top Layer w0.254: U9.6@191.5,100.2 192.5,100.2 195.85,96.85 197.385,96.85 XP10.6@198.385,95.85
NetU10_4: U10.4 XP11.8 | length 7.6
  Top Layer w0.254: U10.4@191.5,76.45 196.675,76.45 XP11.8@198.375,74.75
NetVT1_3: VT1.3 XP8.2 | length 3
  Top Layer w0.3: XP8.2@173.4,107.718 XP8.2@173.425,107.743
  Top Layer w0.5: VT1.3@173.4,104.768 XP8.2@173.4,107.718
NRST: C27.1 DD1.25 XP5.5 | length 40.7
  Top Layer w0.3: v1(92.425,67.8) DD1.25@92.425,69.3
  Top Layer w0.5: XP5.5@115.85,45.835 116.148,45.835 116.663,46.35 C27.1@118,46.35
  Power Layer w0.3: v1(92.425,67.8) 92.425,62.875 104.2,51.1 113.075,51.1 114.575,49.6 114.575,47.11 XP5.5@115.85,45.835
OSC32_IN: C20.1 DD1.8 ZQ2.2 | length 7.2
  Top Layer w0.3: DD1.8@100.925,69.3 100.925,72.35 100.375,72.9 C20.1@100.375,73.775 101.175,73.775 101.55,74.15 101.55,74.425 101.9,74.775 ZQ2.2@102.3,74.775
OSC32_OUT: C13.1 DD1.9 ZQ2.1 | length 12.8
  Top Layer w0.3: C13.1@100.375,78.2 C13.1@100.35,78.175 ; DD1.9@100.425,69.3 100.425,71.8 99.225,73 99.225,77.8 99.6,78.175 C13.1@100.35,78.175 ; ZQ2.1@102.3,77.275 101.875,77.275 101.55,77.6 101.55,77.85 101.225,78.175 C13.1@100.35,78.175
OSC_IN: C19.1 DD1.23 ZQ1.3 | length 10.9
  Top Layer w0.3: ZQ1.3@93.275,76.025 93.175,76.125 C19.1@93.175,77.55 93.431,77.294 93.856,77.294 94.325,76.825 94.325,72.025 93.425,71.125 DD1.23@93.425,69.3
OSC_OUT: C12.1 DD1.24 ZQ1.1 | length 6
  Top Layer w0.3: ZQ1.1@91.575,74.725 91.625,74.675 C12.1@91.625,73.2 ; C12.1@91.625,73.2 91.624,72.451 92.925,71.15 DD1.24@92.925,69.3
PD1_A: R12.2 R13.1 XP1.2 | length 5.2
  Top Layer w0.5: R12.2@34.6,102.55 34.6,107.65 XP1.2@34.65,107.7
PD1_ADC: C41.1 DD1.27 R16.2 | length 93
  Top Layer w0.3: DD1.27@91.425,69.3 91.425,69.875 v1(91.425,70.6)
  Top Layer w0.5: R16.2@18.5,101.975 C41.1@18.5,103.475 v1(18.5,104.475)
  Bottom Layer w0.3: v1(18.5,104.475) 18.5,100.65 25.7,93.45 51.175,93.45 69.05,75.575 86.45,75.575 v1(91.425,70.6)
PD1_C: C36.2 DA5.2 R11.1 XP1.1 | length 13.2
  Top Layer w0.5: DA5.2@30.95,100.05 32.95,100.05 C36.2@33.1,100.2 34.275,100.2 34.775,100.7 R11.1@36.8,100.7 ; R11.1@36.825,100.7 37.1,100.975 XP1.1@37.1,107.7
PD1_ERR: DA6.5 DD1.26 | length 90.5
  Top Layer w0.3: v1(18.575,97.975) 20.3,97.975 20.5,97.775 DA6.5@20.5,96.9 ; v1(91.6,67.8) 91.657,67.857 91.657,68.082 91.925,68.35 DD1.26@91.925,69.3
  Bottom Layer w0.3: v1(18.575,97.975) 24.625,91.925 49.95,91.925 67.7,74.175 86.025,74.175 89.175,71.025 89.175,70.225 v1(91.6,67.8)
POWER_COL: DD1.126 R51.2 | length 90.7
  Top Layer w0.3: DD1.126@106.4,58.325 120.634,58.325 124.684,62.375 155.623,62.375 179.9,86.652 179.9,90.5 180.5,91.1 R51.2@181.25,91.1
POWER_IND: DD1.123 R48.2 | length 84.3
  Top Layer w0.3: DD1.123@106.4,56.825 121.043,56.825 125.243,61.025 156.186,61.025 174.911,79.75 R48.2@181.25,79.75
PS1_ERR1: DD1.142 DD4A6.7 | length 56.7
  Top Layer w0.3: DD1.142@106.4,66.325 v1(107.625,66.325) ; DD4A6.7@148.925,89.475 148.975,89.425 148.975,81.875 v1(149.025,81.825)
  Bottom Layer w0.3: v1(107.625,66.325) 111.45,66.325 126.95,81.825 v1(149.025,81.825)
PS1_ERR2: DD1.1 DD4A6.6 | length 55.1
  Top Layer w0.3: DD1.1@104.425,69.3 104.425,70.766 107.834,74.175 136.9,74.175 147.625,84.9 DD4A6.6@147.625,89.475
PS1_ON: DD1.141 R21A6.1 | length 57.4
  Top Layer w0.3: v1(104.9,65.825) DD1.141@106.4,65.825
  Bottom Layer w0.3: v1(104.9,65.825) 104.9,68.425 120,83.525 v1(151.95,83.525)
PS1_PV: DD1.136 DD3A6.2 | length 64.7
  Top Layer w0.3: DD1.136@106.4,63.325 107.199,63.325 107.599,62.925 v1(107.675,62.925) ; v1(156.55,83.725) 156.55,89.475
  Bottom Layer w0.3: v1(107.675,62.925) 110.651,62.925 120.976,73.25 146.075,73.25 v1(156.55,83.725)
PS2_ERR1: DD1.3 DD4A7.7 | length 38.7
  Top Layer w0.3: DD1.3@103.425,69.3 103.425,71.039 107.486,75.1 121.464,75.1 128.525,82.161 DD4A7.7@128.525,89.375
PS2_ERR2: DD1.5 DD4A7.6 | length 38.5
  Top Layer w0.3: DD1.5@102.425,69.3 102.425,70.675 107.3,75.55 121.277,75.55 127.225,81.498 DD4A7.6@127.225,89.375
PS2_ON: DD1.2 R21A7.1 | length 35.9
  Top Layer w0.3: DD1.2@103.925,69.3 103.925,70.902 107.673,74.65 121.65,74.65 131.525,84.525 R21A7.1@131.525,85.575
PS2_PV: DD1.137 DD3A7.2 | length 44.9
  Top Layer w0.3: DD1.137@106.4,63.825 107.494,63.825 107.594,63.725 v1(107.675,63.725) ; v1(132.275,77.275) 135.675,80.675 DD3A7.2@135.675,89.2
  Bottom Layer w0.3: v1(107.675,63.725) 110.2,63.725 123.75,77.275 v1(132.275,77.275)
PS3_ERR1: DD1.10 DD4A8.7 | length 24.7
  Top Layer w0.3: DD1.10@99.925,69.3 99.925,71.384 98.625,72.684 98.625,78.114 108.1,87.589 DD4A8.7@108.1,89.55
PS3_ERR2: DD1.11 DD4A8.6 | length 24.3
  Top Layer w0.3: DD1.11@99.425,69.3 99.425,71.248 98.175,72.498 98.175,78.3 106.8,86.925 DD4A8.6@106.8,89.55
PS3_ON: DD1.7 R21A8.1 | length 20.4
  Top Layer w0.3: DD1.7@101.425,69.3 101.425,71.425 111.15,81.15 R21A8.1@111.15,85.7
PS3_PV: DD1.139 DD3A8.2 | length 30.6
  Top Layer w0.3: v1(104.9,64.825) 105.65,64.825 DD1.139@106.4,64.825 ; 115.561,89.411 115.7,89.272 v1(115.7,77.575)
  Bottom Layer w0.3: v1(104.9,64.825) 105.975,65.9 105.975,67.85 v1(115.7,77.575)
PS4_ERR1: DD1.13 DD4A9.7 | length 26.9
  Top Layer w0.3: DD4A9.7@86.85,89.475 86.85,85.311 90.736,81.425 93.971,81.425 97.275,78.121 97.275,72.125 98.425,70.975 DD1.13@98.425,69.3
PS4_ERR2: DD1.14 DD4A9.6 | length 27.2
  Top Layer w0.3: DD4A9.6@85.55,89.475 85.55,85.975 90.55,80.975 93.784,80.975 96.825,77.934 96.825,71.939 97.925,70.839 DD1.14@97.925,69.3
PS4_ON: DD1.12 R21A9.1 | length 22.2
  Top Layer w0.3: R21A9.1@89.775,85.775 89.775,83.023 90.923,81.875 94.157,81.875 97.725,78.307 97.725,72.311 98.925,71.111 DD1.12@98.925,69.3
PS4_PV: DD1.140 DD3A9.2 | length 32.2
  Top Layer w0.3: DD3A9.2@94,89.2 94.013,89.188 94.013,87.262 v1(95.45,85.825) ; DD1.140@106.4,65.325 v1(107.625,65.325)
  GND Layer w0.3: v1(95.45,85.825) 97.95,85.825 106.13,77.645 106.13,66.82 v1(107.625,65.325)
PS5_ERR1: DD1.18 DD4A10.7 | length 45
  Top Layer w0.3: DD4A10.7@66.6,89.2 66.6,84.85 71.375,80.075 93.411,80.075 95.925,77.561 DD1.18@95.925,69.3
PS5_ERR2: DD1.19 DD4A10.6 | length 45.3
  Top Layer w0.3: DD4A10.6@65.3,89.2 65.3,85.425 71.1,79.625 93.225,79.625 95.425,77.425 DD1.19@95.425,69.3
PS5_ON: DD1.15 R21A10.1 | length 40.3
  Top Layer w0.3: R21A10.1@71,85.825 71,81.2 71.675,80.525 93.598,80.525 96.375,77.748 96.375,71.752 97.425,70.702 DD1.15@97.425,69.3
PS5_PV: DD1.20 DD3A10.2 | length 35
  Top Layer w0.3: DD3A10.2@73.75,89.2 73.75,87.585 v1(74.81,86.525) ; v1(82.325,79) 93.111,79 94.925,77.186 DD1.20@94.925,69.3
  Bottom Layer w0.3: v1(74.81,86.525) 74.81,86.52 82.325,79.005 v1(82.325,79)
RD_N: DA19.4 R67.1 R70.2 XS1.6 | length 35.9
  Top Layer w0.3: R70.2@181.35,59.975 181.35,60.025 181.773,60.448 182.454,60.448 183.804,61.797 184.71,61.797 185.325,61.182 185.325,60.256 185.265,60.196 185.265,58.844 185.425,58.684 185.425,57.731 184.881,57.187 184.633,57.187 184.457,57.363 184.457,58.025 XS1.6@184.275,58.207
  Top Layer w0.381: R67.1@181.35,58.475 R70.2@181.35,59.975
  Bottom Layer w0.3: DA19.4@182.225,45.726 182.35,45.6 182.847,45.6 183.023,45.424 183.023,44.796 183.523,44.296 185.721,44.296 187.475,46.05 187.475,49.667 188.967,51.158 188.967,51.212 189.11,51.355 189.11,56.617 188.512,57.214 188.023,57.214 187.03,58.207 XS1.6@184.275,58.207
RD_P: DA19.3 R68.1 R73.2 XS1.4 | length 35
  Top Layer w0.3: R68.1@181.35,62.975 R73.2@181.35,61.476 181.35,61.425 181.773,61.002 182.225,61.002 183.574,62.351 184.939,62.351 185.879,61.412 185.879,60.026 185.765,59.912 185.765,59.051 185.925,58.891 185.925,57.524 185.088,56.687 184.633,56.687 184.457,56.512 184.457,55.85 XS1.4@184.275,55.667
  Bottom Layer w0.3: XS1.4@184.275,55.667 187.03,55.667 188.061,56.699 188.298,56.699 188.594,56.403 188.594,51.569 186.921,49.896 186.921,46.279 185.492,44.85 183.753,44.85 183.577,45.026 183.577,45.424 183.753,45.6 184.25,45.6 DA19.3@184.375,45.726
RE/DE: DD1.68 DD11.4 DD11.5 | length 72.5
  Top Layer w0.3: v1(82,52.025) 82.825,52.025 83.025,51.825 DD1.68@84.95,51.825
  Top Layer w0.5: DD11.4@20.15,42.019 20.15,42.644 DD11.5@20.15,43.289
  Top Layer w1: 20.15,42.644 v1(21.75,42.644)
  Bottom Layer w0.5: v1(21.75,42.644) 20.95,43.444 20.95,44.925 22.65,46.625 66.587,46.625 71.987,52.025 v1(82,52.025)
Rx485: DD1.70 DD11.3 | length 69
  Top Layer w0.3: v1(82,50.625) 82.775,50.625 82.975,50.825 DD1.70@84.95,50.825
  Top Layer w0.5: DD11.3@20.15,40.749 20.152,40.747 21.748,40.747 v1(21.75,40.744)
  Bottom Layer w0.5: v1(21.75,40.744) 26.231,45.225 67.025,45.225 72.425,50.625 v1(82,50.625)
RXI_N: DD12.5 R70.1 | length 9.4
  Top Layer w0.3: DD12.5@173.375,56.15 175.106,56.15 176.875,57.919 176.875,59.743 177.54,60.408 178.317,60.408 178.75,59.975 R70.1@179.8,59.975
RXI_P: DD12.6 R73.1 | length 9.5
  Top Layer w0.3: DD12.6@173.375,56.65 174.899,56.65 176.375,58.126 176.375,59.95 177.332,60.908 178.333,60.908 178.9,61.475 R73.1@179.8,61.476
START_BUT: DD1.119 DD8.4 | length 81.1
  Top Layer w0.3: DD1.119@106.4,54.825 120.316,54.825 125.616,60.125 156.775,60.125 v1(172.3,75.65)
  Bottom Layer w0.3: v1(172.3,75.65) 174.575,77.925 176.45,77.925 176.9,78.375 176.9,78.7 177.025,78.825 DD8.4@177.35,78.825
START_IND: DD1.122 R60.2 | length 83.2
  Top Layer w0.3: DD1.122@106.4,56.325 121.18,56.325 125.43,60.575 156.373,60.575 172.298,76.5 R60.2@181.25,76.5
SWCLK: DD1.109 XP5.2 | length 5.2
  Top Layer w0.3: DD1.109@106.4,49.825 106.968,49.825 106.968,49.482 108.075,48.375 XP5.2@110.77,48.375
SWDIO: DD1.105 XP5.4 | length 16.4
  Top Layer w0.3: DD1.105@102.925,47.85 102.925,45 103.925,44 107.875,44 108.65,44.775 108.65,46.323 109.427,47.1 112.035,47.1 XP5.4@113.31,48.375
T1: R19A2.2 R20A2.1 XP2.1 | length 5.6
  Top Layer w0.5: XP2.1@53.575,106.375 53.925,106.025 53.925,105.3 55.393,103.832 55.393,102.968 R19A2.2@55.375,102.95 R20A2.1@53.925,102.95
T1_ADC: C45A2.1 DD1.28 R20A2.2 | length 59.9
  Top Layer w0.3: v1(90.763,67.788) 90.763,67.869 90.925,68.031 DD1.28@90.925,69.3
  Top Layer w0.5: v1(53.9,98.975) 53.887,98.987 53.887,99.987 C45A2.1@53.875,100 53.9,100.025 53.9,101.375 R20A2.2@53.925,101.4
  GND Layer w0.3: v1(53.9,98.975) 53.9,95.675 72,77.575 85.95,77.575 92.225,71.3 92.225,70 90.8,68.575 90.8,67.825 v1(90.763,67.788)
T2: R19A3.2 R20A3.1 XP2.3 | length 5.2
  Top Layer w0.5: R20A3.1@51.025,102.95 R19A3.2@52.475,102.95 52.475,103.875 51.575,104.775 XP2.3@51.575,106.375
T2_ADC: C45A3.1 DD1.29 R20A3.2 | length 57
  Top Layer w0.3: DD1.29@90.425,69.3 90.425,69.875 v1(90.425,70.6)
  Top Layer w0.5: v1(51,98.975) 50.988,98.987 50.988,99.988 C45A3.1@50.975,100 51,100.025 51,101.375 R20A3.2@51.025,101.4
  GND Layer w0.3: v1(51,98.975) 51,96.7 70.9,76.8 85.489,76.8 90.425,71.864 v1(90.425,70.6)
T3: R19A4.2 R20A4.1 XP2.5 | length 4.9
  Top Layer w0.5: R20A4.1@48.125,102.95 R19A4.2@49.575,102.95 XP2.5@49.575,106.375
T3_ADC: C45A4.1 DD1.34 R20A4.2 | length 57.5
  Top Layer w0.3: DD1.34@87.925,69.3 87.925,70.444 88,70.519 v1(88,70.6)
  Top Layer w0.5: v1(48.1,98.975) 48.088,98.987 48.088,99.987 C45A4.1@48.075,100 48.1,100.025 48.1,101.375 R20A4.2@48.125,101.4
  GND Layer w0.3: v1(48.1,98.975) 48.1,97.795 69.92,75.975 85.01,75.975 88,72.985 v1(88,70.6)
T4: R19A5.2 R20A5.1 XP2.7 | length 5.2
  Top Layer w0.5: R20A5.1@45.225,102.95 R19A5.2@46.675,102.95 46.675,104 47.575,104.9 XP2.7@47.575,106.375
T4_ADC: C45A5.1 DD1.35 R20A5.2 | length 58.7
  Top Layer w0.3: v1(87.2,70.6) 87.2,70.519 87.425,70.294 DD1.35@87.425,69.3
  Top Layer w0.5: v1(45.2,98.975) 45.188,98.987 45.188,99.987 C45A5.1@45.175,100 45.2,100.025 45.2,101.375 R20A5.2@45.225,101.4
  GND Layer w0.3: v1(45.2,98.975) 68.975,75.2 84.548,75.2 87.2,72.548 v1(87.2,70.6)
TD_N: DA19.6 R65.1 R69.2 XS1.3 | length 25
  Top Layer w0.3: R69.2@181.35,51.957 181.529,51.957 181.773,52.201 182.272,52.201 182.575,51.897 182.575,51.049 183.629,49.996 187.971,49.996 189.075,51.1 189.075,52.633 188.304,53.404 187.2,53.404 187.024,53.58 187.024,54.188 XS1.3@186.815,54.397
  Top Layer w0.381: R65.1@181.35,50.229 R69.2@181.35,51.727
  Bottom Layer w0.3: DA19.6@182.225,47.625 182.35,47.75 182.847,47.75 183.023,47.926 183.023,48.781 185.325,51.083 185.325,52.262 186.606,53.543 186.606,54.188 XS1.3@186.815,54.397
TD_P: DA19.1 R66.1 R72.2 XS1.1 | length 20.5
  Top Layer w0.3: R72.2@181.35,53.228 181.35,53.178 181.773,52.754 182.501,52.754 183.129,52.126 183.129,51.279 183.858,50.55 187.742,50.55 188.521,51.329 188.521,52.404 188.075,52.85 187.522,52.85 187.346,52.675 187.346,52.389 XS1.1@186.815,51.857
  Top Layer w0.381: R72.2@181.35,53.228 R66.1@181.35,54.728
  Bottom Layer w0.3: DA19.1@184.375,47.626 184.25,47.75 183.753,47.75 183.577,47.926 183.577,48.552 185.879,50.854 185.879,51.132 186.055,51.307 186.265,51.307 XS1.1@186.815,51.857
Tx485: DD1.69 DD11.6 | length 67.6
  Top Layer w0.3: v1(82.475,51.325) DD1.69@84.95,51.325
  Top Layer w0.5: DD11.6@20.15,44.559 20.155,44.564 21.745,44.564 v1(21.75,44.569)
  Bottom Layer w0.5: v1(21.75,44.569) 23.108,45.927 66.808,45.927 72.206,51.325 v1(82.475,51.325)
TXO_N: DD12.2 R69.1 | length 8.9
  Top Layer w0.3: DD12.2@173.375,54.65 174.83,54.65 175.021,54.459 175.304,54.177 ccw(c175.869,54.742) 176.435,54.177 176.458,54.2 cw(c176.652,54.005) 176.847,54.2 cw(c176.652,54.005) 176.847,53.811 ccw(c177.024,53.634) 176.846,53.81 176.824,53.788 ccw(c177.39,53.222) 176.824,52.656 177.252,52.228 177.316,52.228 177.343,52.201 177.747,52.201 178.425,52.201 178.898,51.727 R69.1@179.8,51.727
TXO_P: DD12.3 R72.1 | length 8.9
  Top Layer w0.3: DD12.3@173.375,55.15 175.037,55.15 175.374,54.813 175.657,54.53 ccw(c175.869,54.742) 176.081,54.53 176.106,54.555 cw(c176.652,54.005) 177.2,54.553 cw(c176.652,54.005) 177.274,53.542 177.274,53.53 177.177,53.434 ccw(c177.39,53.222) 177.177,53.01 177.432,52.755 178.301,52.755 178.379,52.755 178.853,53.228 R72.1@179.8,53.228
XSCI: DD12.12 R76.2 R78.1 | length 11
  Top Layer w0.3: R78.1@169.375,66.651 169.375,64.95 169.975,64.35 R76.2@171.1,64.35 171.224,64.226 171.224,63.601 171.575,63.25 173.009,63.25 173.975,62.284 173.975,59.65 DD12.12@173.375,59.65
XSCO: C110.1 DD12.11 R76.1 ZQ3.1 | length 11.4
  Top Layer w0.3: DD12.11@173.375,59.15 174.42,59.15 174.74,59.47 174.74,62.985 173.375,64.35 R76.1@172.65,64.35 172.65,66.025 172.775,66.15 172.775,66.2 173.225,66.65 C110.1@174.45,66.651
pads on no net: DA1.3 DA1.5 DA1.8 DA3.5 DA3.8 DA5.5 DA11A11.3 DA11A11.5 DA11A11.8 DA11A12.3 DA11A12.5 DA11A12.8 DA11A13.3 DA11A13.5 DA11A13.8 DA11A14.3 DA11A14.5 DA11A14.8 DA11A15.3 DA11A15.5 DA11A15.8 DD1.22 DD1.49 DD1.50 DD1.56 DD1.57 DD1.58 DD1.59 DD1.60 DD1.63 DD1.64 DD1.65 DD1.104 DD6.1 DD7.1 DD8.1 DD9.1 DD12.18 DD12.19 DD12.21 DD12.34 DD12.35 DD12.37 DD12.38 DD12.39 DD12.40 DD12.41 DD12.42 DD12.43 DD12.44 XP5.6 XP6A6.7 XP6A6.8 XP6A7.7 XP6A7.8 XP6A8.7 XP6A8.8 XP6A9.7 XP6A9.8 XP6A10.7 XP6A10.8 XP9.7 XP9.8 XP10.7 XP10.8 XS1. XS1.7 XS1.8

## Polygon pours and split planes (outlines as drawn)
GND_PSA10 on Top Layer "NONET_L-01_P-001" (solid, remove dead copper, pour order 44): 62.5,93.5 81.75,93.5 81.75,110 62.5,110
AGND_CS on Top Layer "NONET_L-01_P-001" (solid, remove dead copper, pour order 42): 0,56.594 15.25,56.594 15.25,88.819 0,88.819
AGND on Top Layer "NONET_L-01_P-001" (solid, remove dead copper, pour order 21): 10.5,110 10.5,91.125 22.25,91.125 22.25,53.375 ccw(c23.75,53.375) 23.75,51.875 27.25,51.875 cw(c27.251,50.376) 28.75,50.375 28.75,36.925 cw(c25.312,37.188) 25.575,33.75 6.625,33.75 6.625,20.5 ccw(c8.124,20.499) 8.125,19 31.75,19 31.75,22 41.025,22 41.025,19 63.525,19 63.525,22 72.8,22 72.8,19 95.3,19 95.3,22 104.575,22 104.575,19 127.075,19 127.075,22 136.35,22 136.35,19 158.85,19 158.85,22 168.125,22 168.125,35.125 ccw(c166.625,35.125) 166.625,36.625 61.25,36.625 cw(c61.25,38.125) 59.75,38.125 59.75,110
GND_RS485 on Top Layer "NONET_L-01_P-001" (solid, remove dead copper, pour order 34): 0,49.494 13.375,49.494 13.375,35.869 0,35.869
GND on Top Layer "NONET_L-01_P-001" (solid, pour order 23): 25.25,49.5 25.25,37.369 cw(c23.75,37.369) 23.75,35.869 17.5,35.869 17.5,49.5
GND_DRVA14 on Top Layer "GND_DRVA14_L01_P009" (solid, remove dead copper, pour order 9): 104.575,15.5 104.575,0 127.075,0 127.075,15.5
GND_PSA6 on Top Layer "NONET_L-01_P-001" (solid, remove dead copper, pour order 39): 145.625,93.5 145.625,110 166,110 166,93.5
GND_PSA7 on Top Layer "NONET_L-01_P-001" (solid, remove dead copper, pour order 38): 125.75,93.5 125.75,110 144.575,110 144.575,93.5
GND_PSA8 on Top Layer "NONET_L-01_P-001" (solid, remove dead copper, pour order 37): 104.5,93.5 104.5,110 124.875,110 124.875,93.5
GND_FS on Top Layer "GND_FS_L01_P036" (solid, pour order 36): 200,44.75 190.5,44.75 ccw(c190.5,42.5) 188.25,42.5 188.25,34.125 200,34.125
GND_DRVA13 on Top Layer "GND_DRVA13_L01_P006" (solid, remove dead copper, pour order 6): 72.8,15.5 72.8,0 95.3,0 95.3,15.5
GND_PSA9 on Top Layer "NONET_L-01_P-001" (solid, remove dead copper, pour order 32): 83.5,93.5 83.5,110 103.875,110 103.875,93.5
GND on Top Layer "NONET_L-01_P-001" (solid, remove dead copper, pour order 25): 62.5,90.875 62.5,40.375 ccw(c64,40.375) 64,38.875 167.21,38.875 cw(c167.21,36.335) 169.75,36.335 169.75,0 181.175,0 181.175,22 185,22 185,46.25 200,46.25 200,73 194.625,73 186.25,73 186.25,103.2 189.875,103.2 189.875,110 168.375,110 168.375,90.875
GND_DRVA12 on Top Layer "GND_DRVA12_L01_P003" (solid, remove dead copper, pour order 3): 41.025,15.5 41.025,0 63.525,0 63.525,15.5
GND_DRVA11 on Top Layer "GND_DRVA11_L01_P018" (solid, remove dead copper, pour order 18): 9.24,15.5 9.24,0 31.74,0 31.74,15.5
GND_DRVA15 on Top Layer "GND_DRVA15_L01_P014" (solid, remove dead copper, pour order 14): 136.35,15.5 136.35,0 158.85,0 158.85,15.5
GND_RS485 on Bottom Layer "NONET_L-01_P-001" (solid, remove dead copper, pour order 46): 0,49.494 13.375,49.494 13.375,35.869 0,35.869
GND_PSA10 on Bottom Layer "NONET_L-01_P-001" (solid, remove dead copper, pour order 31): 62.5,93.5 81.75,93.5 81.75,110 62.5,110
AGND_CS on Bottom Layer "NONET_L-01_P-001" (solid, remove dead copper, pour order 27): 0,56.594 15.25,56.594 15.25,88.819 0,88.819
AGND on Bottom Layer "NONET_L-01_P-001" (solid, pour order 40): 59.75,110 59.75,51.875 27.275,51.875 23.75,51.875 cw(c23.75,53.375) 22.25,53.375 22.25,91.125 10.5,91.125 10.5,110
GND on Bottom Layer "NONET_L-01_P-001" (solid, remove dead copper, pour order 33): 62.5,90.875 62.5,49.494 17.5,49.494 17.5,33.75 6.625,33.75 6.625,20.5 ccw(c8.125,20.5) 8.125,19 31.75,19 31.75,23.125 41.025,23.125 41.025,17.15 63.525,17.15 63.525,23.125 72.8,23.125 72.8,17.15 95.3,17.15 95.3,23.125 104.575,23.125 104.575,17.15 127.075,17.15 127.075,23.125 136.375,23.125 136.375,17.375 158.875,17.375 158.875,23.125 168.125,23.125 168.125,0 181.125,0 181.125,22 185,22 185,46.25 200,46.25 200,73 186.25,73 186.25,103.2 189.875,103.2 189.875,110 168.375,110 168.375,90.875
GND_DRVA14 on Bottom Layer "GND_DRVA14_L04_P010" (solid, remove dead copper, pour order 10): 104.575,15.5 104.575,0.003 127.075,0.003 127.075,15.5
GND_FS on Bottom Layer "GND_FS_L04_P026" (solid, pour order 26): 200,44.75 190.5,44.75 ccw(c190.5,42.5) 188.25,42.5 188.25,34.125 200,34.125
GND_DRVA13 on Bottom Layer "GND_DRVA13_L04_P007" (solid, remove dead copper, pour order 7): 72.8,15.5 72.8,0.003 95.3,0.003 95.3,15.5
GND_DRVA12 on Bottom Layer "GND_DRVA12_L04_P004" (solid, remove dead copper, pour order 4): 41.025,15.5 41.025,0.003 63.525,0.003 63.525,15.5
GND_DRVA11 on Bottom Layer "GND_DRVA11_L04_P019" (solid, remove dead copper, pour order 19): 9.24,15.5 9.24,0.003 31.74,0.003 31.74,15.5
GND_DRVA15 on Bottom Layer "GND_DRVA15_L04_P012" (solid, remove dead copper, pour order 12): 136.35,15.5 136.35,0.003 158.85,0.003 158.85,15.5
GND_RS485 on GND Layer "NONET_L-01_P-001" (solid, remove dead copper, pour order 22): 0,49.494 13.375,49.494 13.375,35.869 0,35.869
GND_PSA10 on GND Layer "NONET_L-01_P-001" (solid, remove dead copper, pour order 45): 62.5,93.5 81.75,93.5 81.75,110 62.5,110
AGND on GND Layer "NONET_L-01_P-001" (solid, pour order 43): 10.5,110 10.5,91.125 22.25,91.125 22.25,53.375 ccw(c23.75,53.375) 23.75,51.875 59.75,51.875 59.75,110
AGND_CS on GND Layer "NONET_L-01_P-001" (solid, remove dead copper, pour order 41): 0,56.594 15.25,56.594 15.25,88.819 0,88.819
GND_DRVA11 on GND Layer "GND_DRVA11_L03_P035" (solid, remove dead copper, pour order 35): 9.24,15.5 9.24,0 31.74,0 31.74,15.5
GND_DRVA13 on GND Layer "GND_DRVA13_L03_P008" (solid, remove dead copper, pour order 8): 72.8,15.5 72.8,0 95.3,0 95.3,15.5
GND on GND Layer "NONET_L-01_P-001" (solid, remove dead copper, pour order 29): 62.5,90.875 62.5,49.5 17.5,49.5 17.5,34.475 8.975,25.95 8.975,22 185,22 185,46.25 188.25,46.25 188.25,73 186.25,73 186.25,103.2 189.875,103.2 189.875,110 168.375,110 168.375,90.875
GND_DRVA12 on GND Layer "GND_DRVA12_L03_P005" (solid, remove dead copper, pour order 5): 41.025,15.5 41.025,0 63.525,0 63.525,15.5
GND_DRVA14 on GND Layer "GND_DRVA14_L03_P011" (solid, remove dead copper, pour order 11): 104.575,15.5 104.575,0 127.075,0 127.075,15.5
GND_DRVA15 on GND Layer "GND_DRVA15_L03_P013" (solid, remove dead copper, pour order 13): 136.35,15.5 136.35,0 158.85,0 158.85,15.5

## Keep-outs
Top Layer:
  lines w0.5: 169.575,10.283 179.225,10.283

## Silkscreen, mask and mechanical layers (free items; w line width, h text height)
Top Assy:
  circle w0.2: c5,5 r1.6
Bottom Assy:
  circle w0.2: c5,5 r1.6